# Altium PCB bmsMaster.PcbDoc (part 1 of 2)
Units mil, origin at the board's own origin, x right, y up, seen from the top; angles counter-clockwise.
Board outline 3600 x 5400 mil, 4 copper layers (Signal 1, Ground, Power, Signal 2), stack 65.512 mil thick; 132 components, 81 nets, 422 pads, 130 vias.
Unrouted connection lines stored in the file: 1.
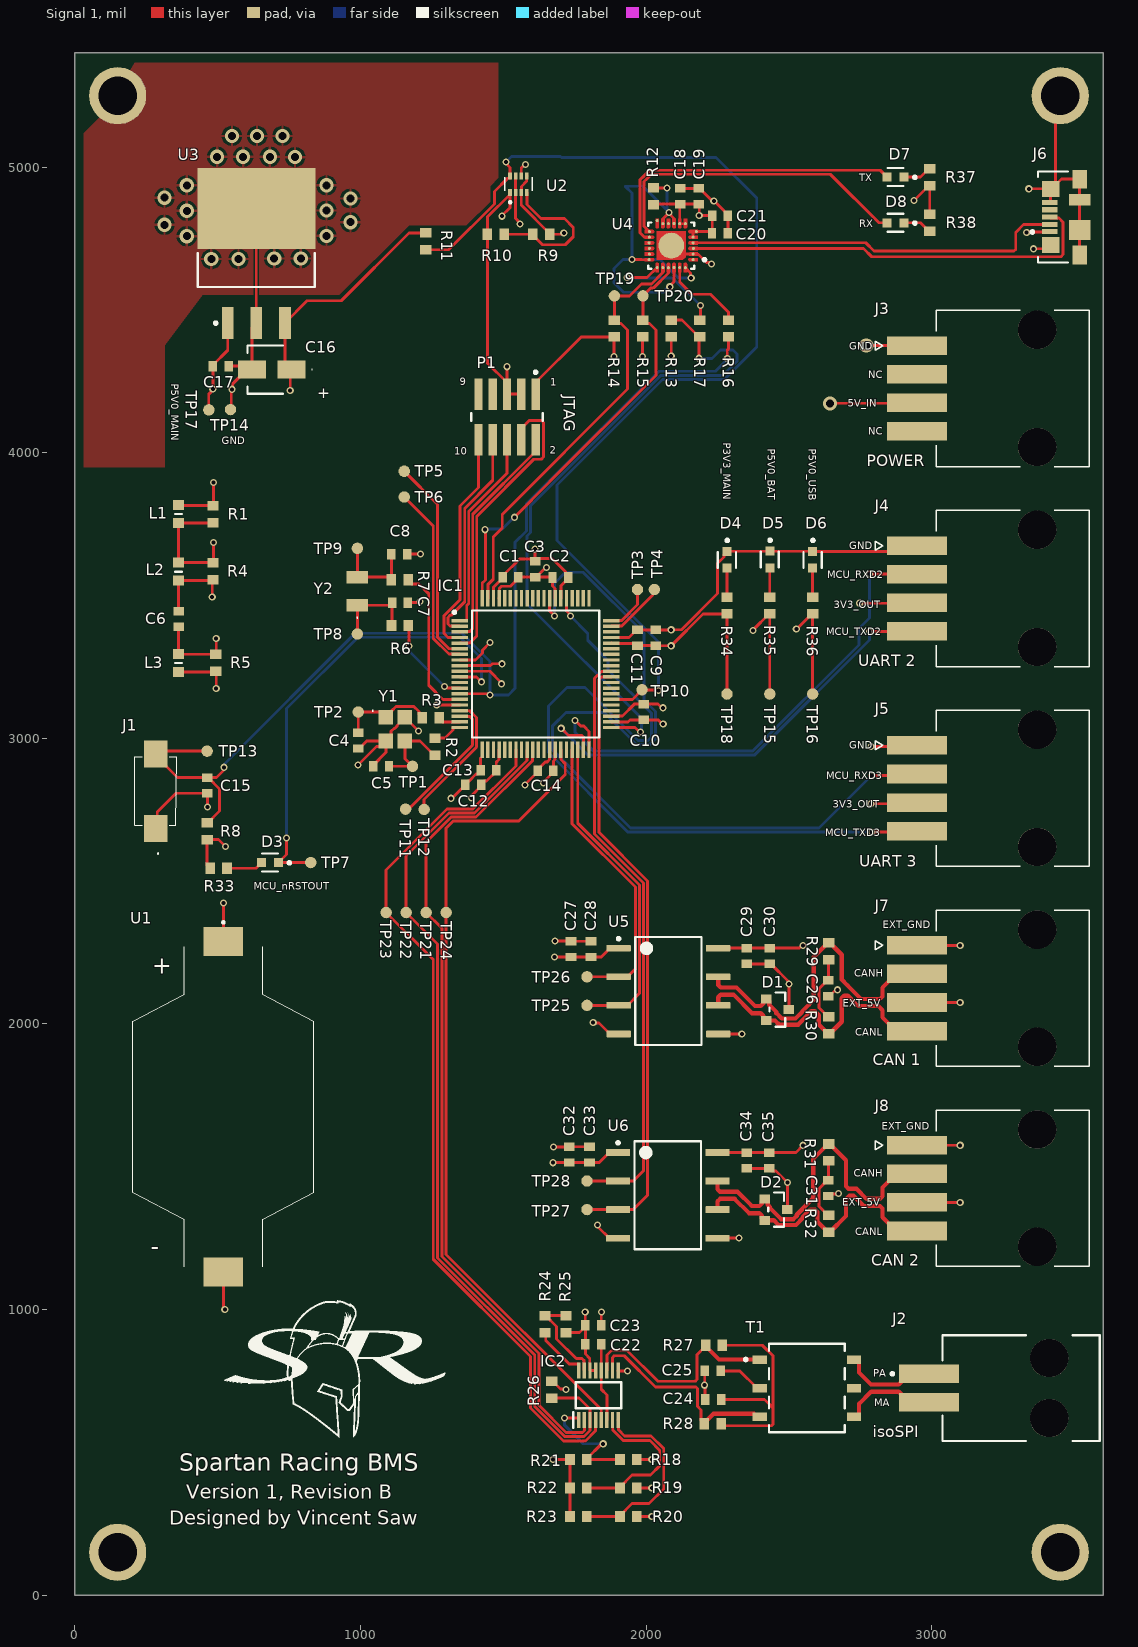
[diagram p0: Signal 1 view]
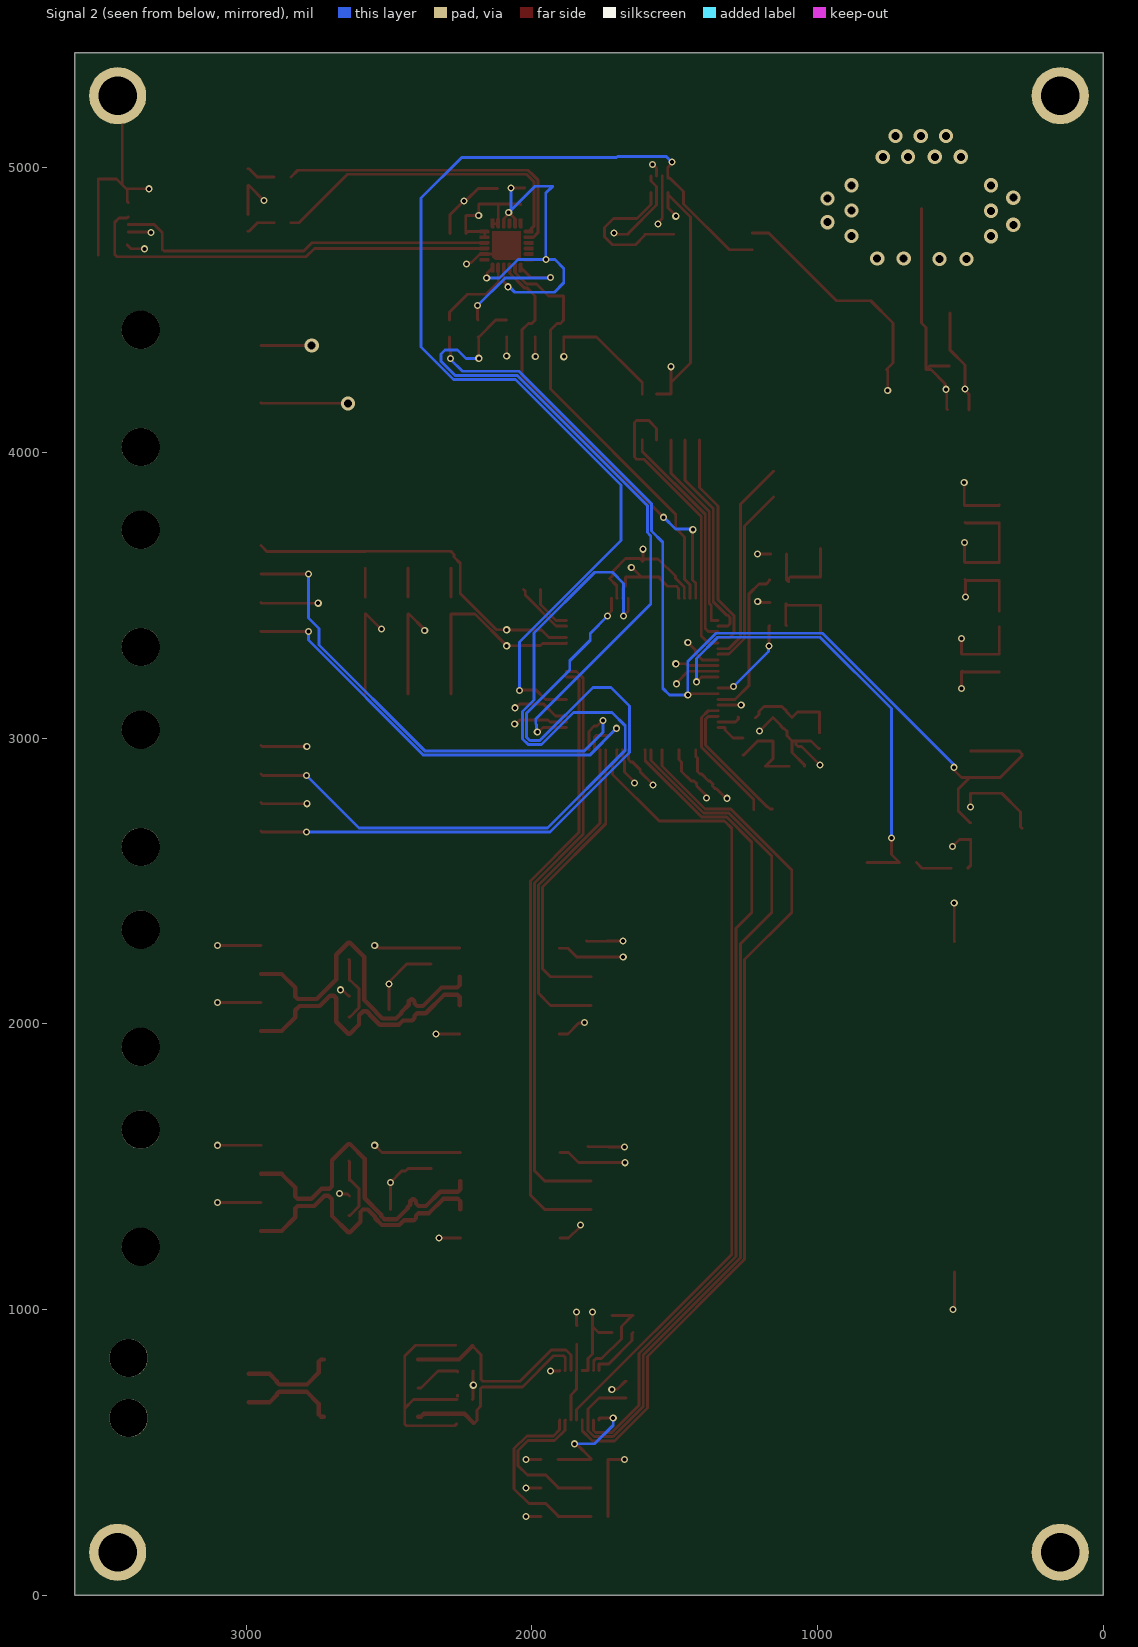
[diagram p1: Signal 2 view, seen from below]
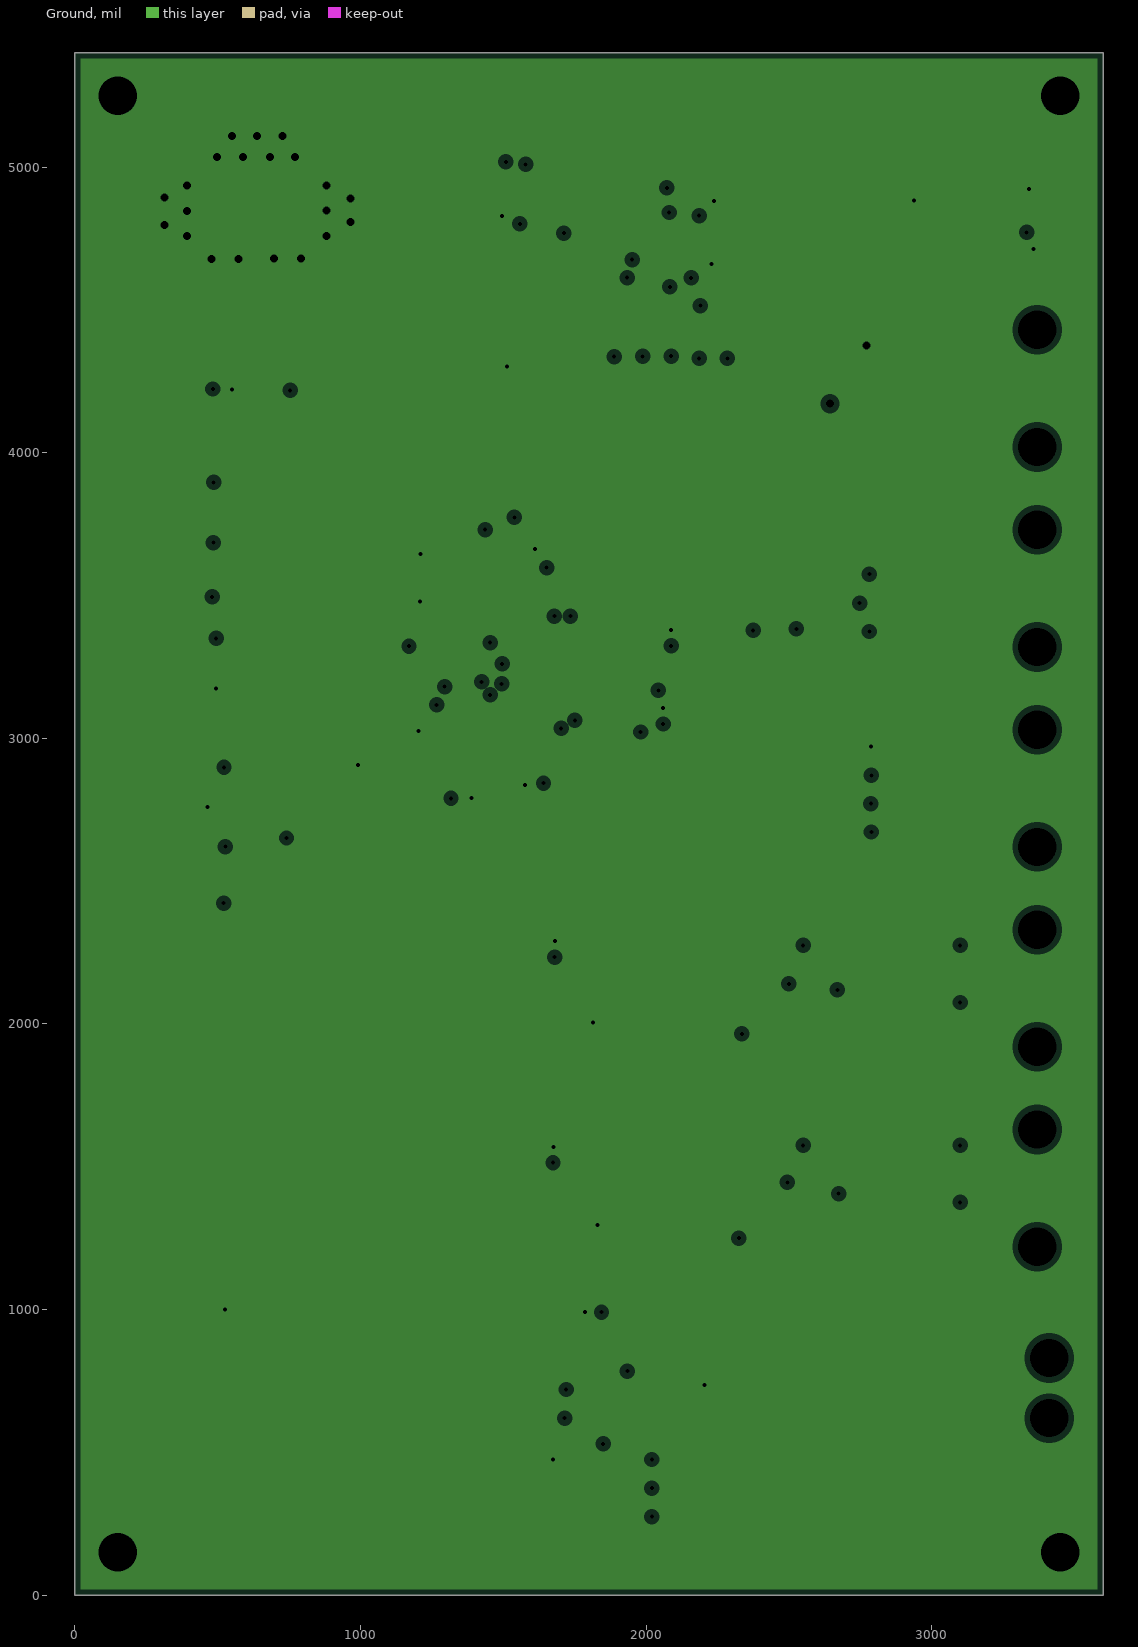
[diagram p2: Ground, clearances drawn from the general rule]
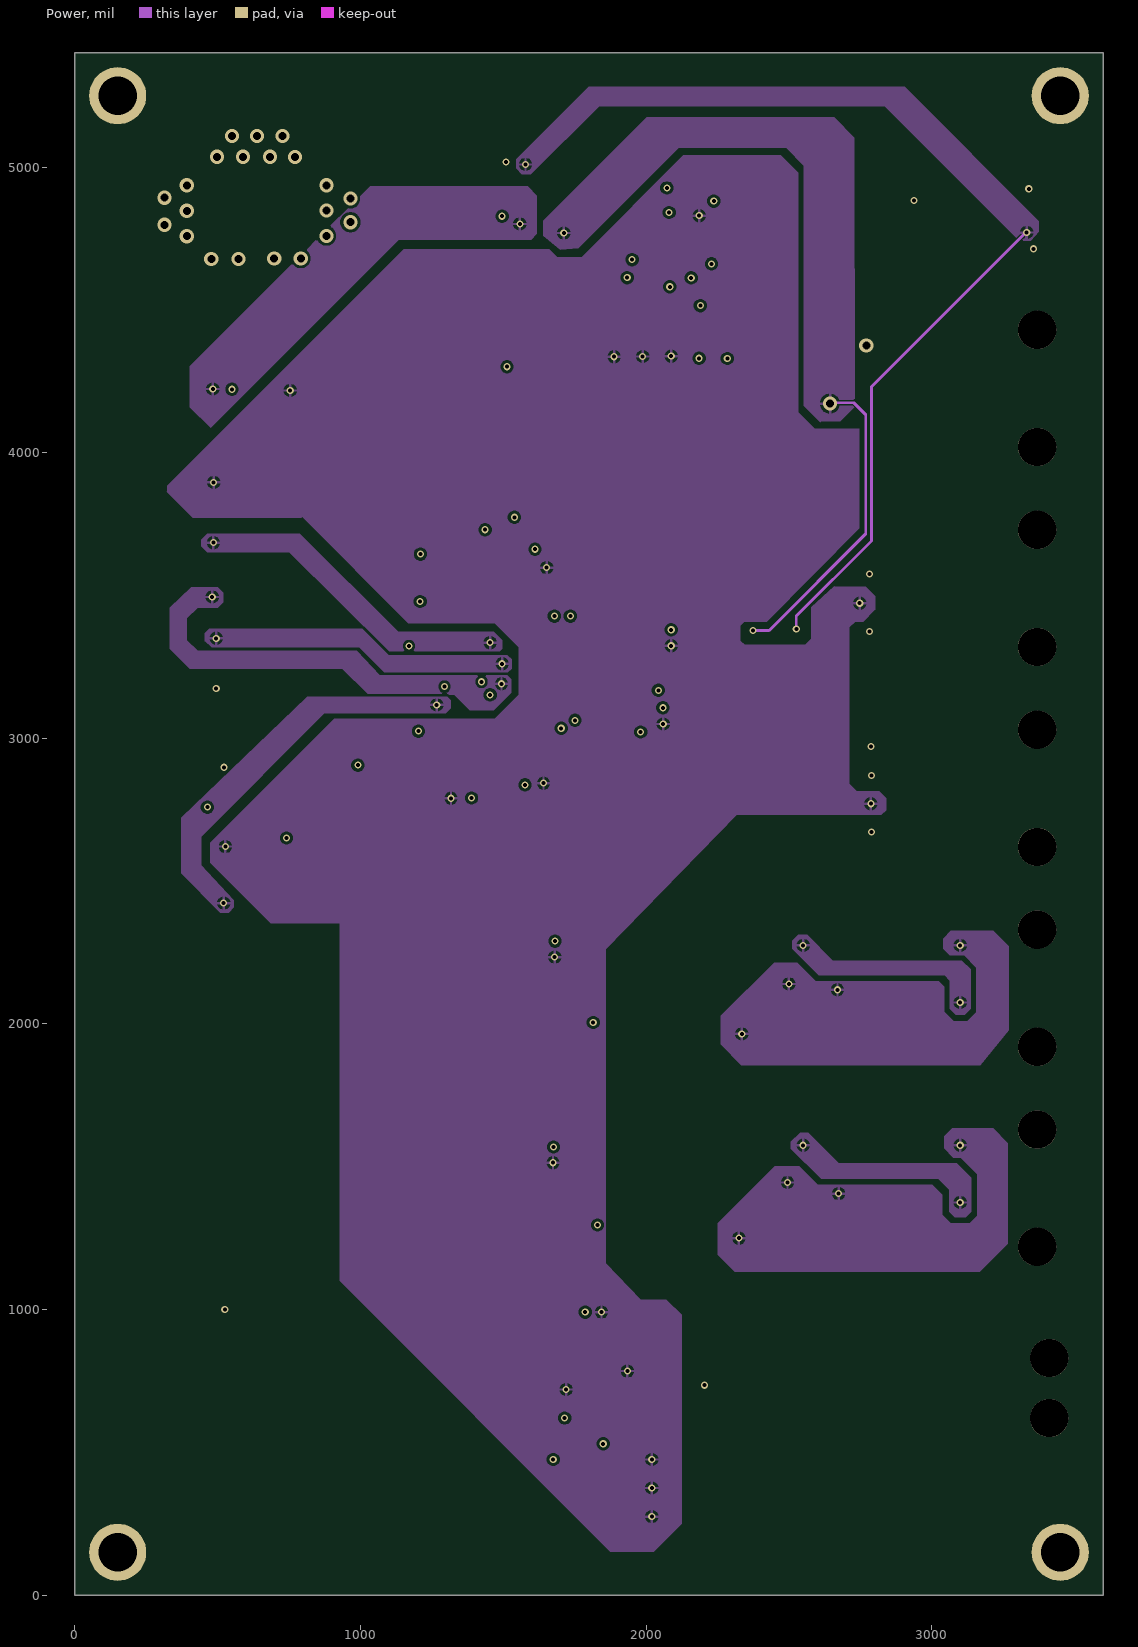
[diagram p3: Power]
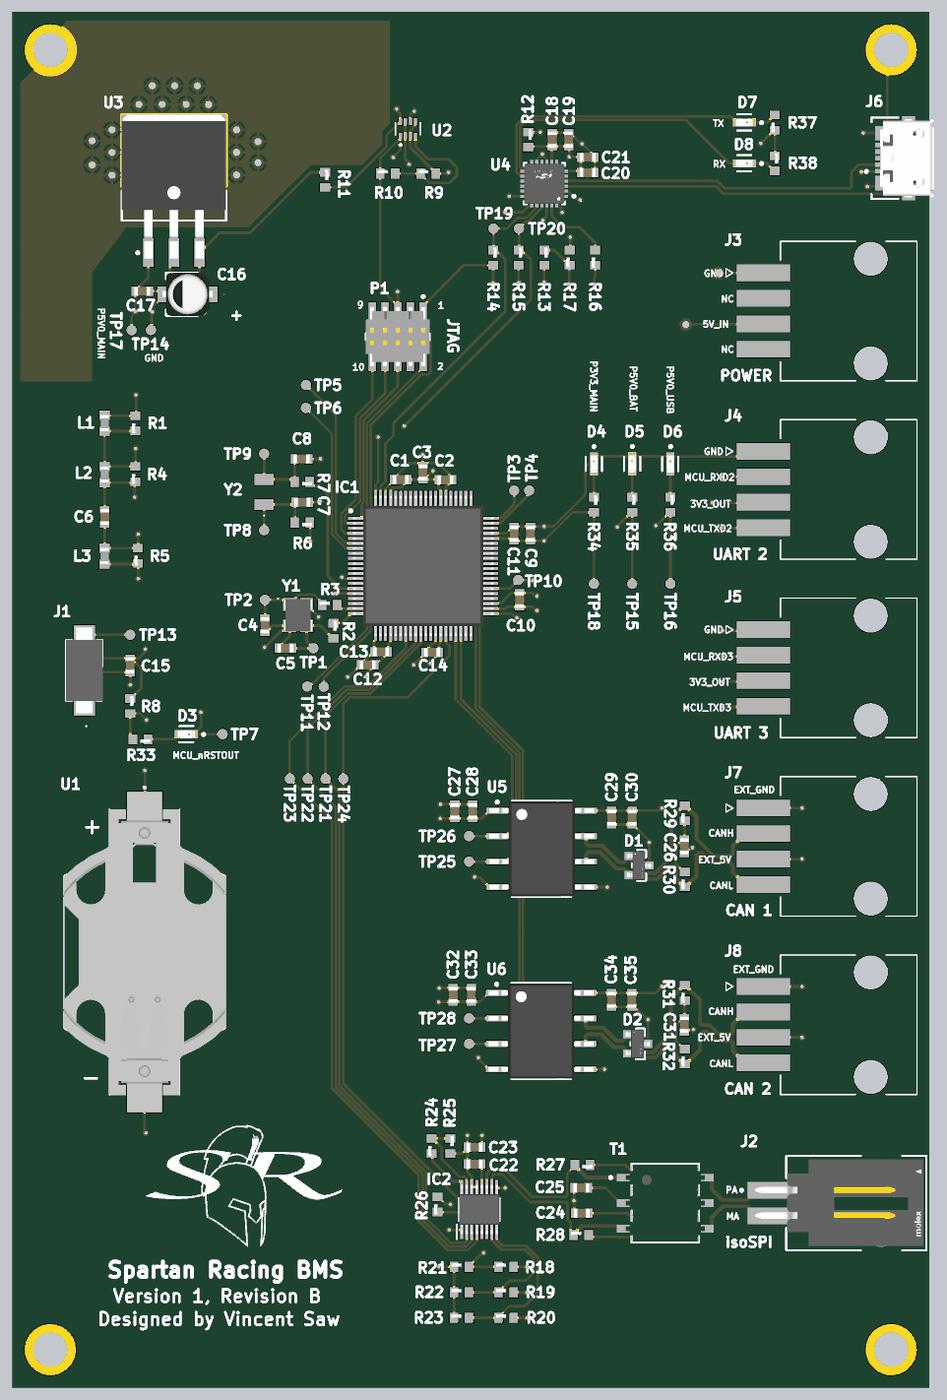
[diagram p5: 3D render of the assembled board from above, using the file's embedded part models]

## Layer stack, top to bottom
Top Solder: solder mask 0.4, Solder Resist, Dk 3.5
Signal 1: signal copper 1.378
Dielectric 2: prepreg 10, PP-006, Dk 4.1
Ground: plane copper 1.378, net GND
Dielectric 1: dielectric 40, FR-4, Dk 4.8
Power: signal copper 1.378
Dielectric 3: prepreg 10, PP-006, Dk 4.1
Signal 2: signal copper 1.378
Bottom Solder: solder mask 0.4, Solder Resist, Dk 3.5

## Board outline
3600,0 0,0 0,5400 3600,5400

## Design rules (kind name [scope] priority, off if disabled: settings)
Clearance [All] p1: gap=10 ignorepadtopadclearanceinfootprint=TRUE except(0: Arc-Hole Track-Hole THPad-Hole Via-Hole Fill-Hole Poly-Hole Region-Hole Text-Hole; 4: Track-Track; 5: Arc-Arc Arc-Track Arc-SMDPad Arc-Fill Arc-Poly Arc-Region Track-Fill Track-Poly Track-Region SMDPad-SMDPad SMDPad-Fill SMDPad-Poly SMDPad-Region SMDPad-Hole Region-Region; 8: Track-SMDPad)
DiffPairsRouting [All] p1: maxlimit=10 minlimit=4 mostfreqgap=10 toplayer_minwidth=4 toplayer_maxwidth=15 toplayer_prefwidth=10 midlayer1_minwidth=4 midlayer1_maxwidth=15 midlayer1_prefwidth=10 bottomlayer_minwidth=4 bottomlayer_maxwidth=15 bottomlayer_prefwidth=10 maxuncoupledlength=750
PlaneClearance [All] p1: clearance=20
PlaneConnect [All] p1: planeconnectstyle=Relief reliefexpansion=20 reliefentries=4 reliefconductorwidth=10 reliefairgap=10
PolygonConnect [All] p1: connectstyle=Relief reliefconductorwidth=10 reliefentries=4 polygonreliefangle="90 Angle" airgapwidth=10
RoutingVias [All] p1: holewidth=0 width=20 viastyle="Through Hole" minholewidth=0 minwidth=20 maxholewidth=28 maxwidth=50
SolderMaskExpansion SolderMaskExpansion_Via [IsVia] p1: expansion=4 istentingtop=TRUE
SolderMaskExpansion [All] p2: expansion=4 istentingtop=FALSE
Width [All] p1: maxlimit=30 minlimit=10 preferedwidth=10 midlayer1_maxwidth=10 bottomlayer_maxwidth=10 minimp=50.000000 maximp=50.000000 favimp=50.000000
27 further rules are at their usual default settings.

## Classes and differential pairs
component class bmsMaster_usb: C18 C19 C21 R12 R13 R14 R15 R16 R17 TP19 TP20 U4
component class bmsMaster_power: C16 C17 R9 R10 R11 TP14 TP15 TP16 TP18 U2 U3
component class bmsMaster_main: C1 C2 C3 C4 C5 C6 C7 C8 C10 C11 C12 C13 C14 C15 J1 L1 L2 L3 R1 R2 R3 R4 R5 R6 R7 R8 TP1 TP2 TP3 TP4 TP5 TP6 TP7 TP8 TP9 TP10 TP11 TP12 TP13 U1 Y1 Y2
component class bmsMaster_led: D3 D4 D5 D6 D7 D8 R33 R34 R35 R36 R37 R38
component class bmsMaster_isospi: C22 C23 C24 C25 IC2 R18 R19 R20 R21 R22 R23 R24 R25 R26 R27 T1 TP21 TP22 TP23 TP24
component class bmsMaster_conn: J2 J3 J4 J5 J6 J7 J8 P1
component class bmsMaster_can: C26 C27 C28 C29 C30 C31 C32 C33 C34 C35 D1 D2 R29 R30 R31 R32 TP25 TP26 TP27 TP28 U5 U6
differential pair USB_D: +USB_D_P -USB_D_N
differential pair ISO_xA: +ISO_xA_P -ISO_xA_N
differential pair ISO_Ix: +ISO_Ix_P -ISO_Ix_N
differential pair CAN_EXT_2: +CAN_EXT_2_P -CAN_EXT_2_N
differential pair CAN_EXT_1: +CAN_EXT_1_P -CAN_EXT_1_N

## Components (designator, comment, footprint, x,y, rotation, side; value= is the part's Value field where it differs from the comment)
C1 "Capacitor" CAPC1608X90N 1525,3564 r0 top value=100n
C2 "Capacitor" CAPC1608X90N 1700,3563 r180 top value=100n
C3 "Capacitor" CAPC1608X90N 1612,3592 r270 top value=10u
C4 "Capacitor" CAPC1608X90N 992.27,2992 r270 top value=20p
C5 "Capacitor" CAPC1608X90N 1072.27,2902 r0 top value=20p
C6 "Capacitor" CAPC1608X90N 363.27,3417.44 r90 top value=100n
C7 "Capacitor" CAPC1608X90N 1138.27,3475 r180 top value=21p
C8 "Capacitor" CAPC1608X90N 1135.83,3645 r180 top value=21p
C9 "Capacitor" CAPC1608X90N 2034,3352 r270 top value=10u
C10 "Capacitor" CAPC1608X90N 1992,3092 r270 top value=100n
C11 "Capacitor" CAPC1608X90N 1970,3352 r270 top value=100n
C12 "Capacitor" CAPC1608X90N 1395,2837 r180 top value=10u
C13 "Capacitor" CAPC1608X90N 1448,2888 r180 top value=100n
C14 "Capacitor" CAPC1608X90N 1648,2886 r0 top value=100n
C15 "Capacitor" CAPC1608X90N 463.27,2835 r90 top value=100n
C16 "EEE-FPJ470UAR" EEE1AA220WR 689,4290.9 r180 top
C17 "Capacitor" CAPC1608X90N 511,4303 r180 top value=0.47u
C18 "Capacitor" CAPC1608X90N 2119.73,4898 r270 top value=100n
C19 "Capacitor" CAPC1608X90N 2184,4898 r270 top value=100n
C20 "Capacitor" CAPC1608X90N 2258.44,4768 r180 top value=100n
C21 "Capacitor" CAPC1608X90N 2259.15,4829 r180 top value=10u
C22 "Capacitor" CAPC1608X90N 1815,878 r180 top value=100n
C23 "Capacitor" CAPC1608X90N 1815,944.27 r180 top value=10u
C24 "Capacitor" CAPC1608X90N 2235,685 r0 top value=10n
C25 "Capacitor" CAPC1608X90N 2233.27,785 r0 top value=10n
C26 "Capacitor" CAPC1608X90N 2638.27,2125 r90 top value=100n
C27 "Capacitor" CAPC1608X90N 1737.27,2262 r90 top value=100n
C28 "Capacitor" CAPC1608X90N 1807.27,2262 r90 top value=10u
C29 "Capacitor" CAPC1608X90N 2353,2238 r90 top value=100n
C30 "Capacitor" CAPC1608X90N 2433,2238 r90 top value=10u
C31 "Capacitor" CAPC1608X90N 2638.27,1425 r90 top value=100n
C32 "Capacitor" CAPC1608X90N 1731.27,1542.44 r90 top value=100n
C33 "Capacitor" CAPC1608X90N 1802,1542.44 r90 top value=10u
C34 "Capacitor" CAPC1608X90N 2352,1522 r90 top value=100n
C35 "Capacitor" CAPC1608X90N 2432,1522 r90 top value=10u
D1 "SZNUP2105LT1G" FP-318-08-MFG 2460,2050 r0 top value=30pF
D2 "SZNUP2105LT1G" FP-318-08-MFG 2455,1350 r0 top value=30pF
D3 "LS L29K-G1J2-1-Z" FP-LS_L29K-MFG 683.27,2565 r180 top
D4 "LS L29K-G1J2-1-Z" FP-LS_L29K-MFG 2283.27,3625 r270 top
D5 "LS L29K-G1J2-1-Z" FP-LS_L29K-MFG 2433.27,3625.47 r270 top
D6 "LS L29K-G1J2-1-Z" FP-LS_L29K-MFG 2583.27,3625 r270 top
D7 "LS L29K-G1J2-1-Z" FP-LS_L29K-MFG 2873.27,4965 r180 top
D8 "LS L29K-G1J2-1-Z" FP-LS_L29K-MFG 2873.27,4805 r180 top
IC1 "LPC4078FBD80,551" QFP50P1400X1400X160-80N 1613.27,3225 r0 top
IC2 "LTC6820HMS#PBF" SOP50P490X110-16N 1833.27,700 r90 top
J1 "PTS636_SM25F_SMTR_LFS" PTS636SM25FSMTRLFS 283.27,2815 r90 top
J2 "15-91-2025" FP-15-91-2025-MFG 3313.27,725 r90 top
J3 "1719770004" MOLEX_1719770004 3213.27,4225 r90 top
J4 "1719770004" MOLEX_1719770004 3213.27,3525 r90 top
J5 "1719770004" MOLEX_1719770004 3213.27,2825 r90 top
J6 "473460001" FP-473460001-MFG 3504.21,4825 r90 top
J7 "1719770004" MOLEX_1719770004 3213.27,2125 r90 top
J8 "1719770004" MOLEX_1719770004 3213.27,1425 r90 top
L1 "Inductor" BEADC1608X95N 363.27,3785 r90 top
L2 "Inductor" BEADC1608X95N 363.27,3583.5 r90 top
L3 "Inductor" BEADC1608X95N 363.27,3263.5 r90 top
P1 "FTSH-105-01-F-DV-K" SMTC-FTSH-105-01-L-DV-K_V 1513.27,4125 r180 top
R1 "Resistor" RESC1608X50N 483.27,3785 r90 top value=0
R2 "Resistor" RESC1608X50N 1261,2971 r270 top value=0
R3 "Resistor" RESC1608X50N 1246,3072 r0 top value=0
R4 "Resistor" RESC1608X50N 483.27,3585.47 r90 top value=0
R5 "Resistor" RESC1608X50N 493.27,3265 r90 top value=0
R6 "Resistor" RESC1608X50N 1138.27,3395 r180 top value=0
R7 "Resistor" RESC1608X50N 1137.8,3555 r180 top value=0
R8 "Resistor" RESC1608X50N 463.27,2675 r270 top value=10k
R9 "Resistor" RESC1608X50N 1632.8,4765 r0 top value=10k
R10 "Resistor" RESC1608X50N 1473.74,4765 r0 top value=35k
R11 "Resistor" RESC1608X50N 1228.27,4740 r270 top value=10k
R12 "Resistor" RESC1608X50N 2026,4898 r270 top value=10k
R13 "Resistor" RESC1608X50N 2088.27,4435 r270 top value=10k
R14 "Resistor" RESC1608X50N 1888.27,4435 r270 top value=10k
R15 "Resistor" RESC1608X50N 1988.27,4435 r270 top value=10k
R16 "Resistor" RESC1608X50N 2288.27,4435 r90 top value=100
R17 "Resistor" RESC1608X50N 2188.27,4435 r90 top value=100
R18 "Resistor" RESC1608X50N 1938.27,475 r0 top value=0
R19 "Resistor" RESC1608X50N 1938.27,375 r0 top value=0
R20 "Resistor" RESC1608X50N 1938.27,275 r0 top value=0
R21 "Resistor" RESC1608X50N 1763.27,475 r0 top value=0
R22 "Resistor" RESC1608X50N 1763.27,375 r0 top value=0
R23 "Resistor" RESC1608X50N 1763.27,275 r0 top value=0
R24 "Resistor" RESC1608X50N 1646,949 r90 top value=1.2k
R25 "Resistor" RESC1608X50N 1719.27,949 r270 top value=806
R26 "Resistor" RESC1608X50N 1670,719.53 r90 top value=2k
R27 "Resistor" RESC1608X50N 2237.8,875 r180 top value=59.4
R28 "Resistor" RESC1608X50N 2233.27,600 r0 top value=59.4
R29 "Resistor" RESC1608X50N 2640,2255 r90 top value=59.4
R30 "Resistor" RESC1608X50N 2640,1995 r90 top value=59.4
R31 "Resistor" RESC1608X50N 2640,1550 r90 top value=59.4
R32 "Resistor" RESC1608X50N 2640,1300 r90 top value=59.4
R33 "Resistor" RESC1608X50N 503.27,2545 r180 top value=470
R34 "Resistor" RESC1608X50N 2283.27,3465 r270 top value=470
R35 "Resistor" RESC1608X50N 2433.27,3465 r270 top value=1k
R36 "Resistor" RESC1608X50N 2583.27,3465 r270 top value=1k
R37 "Resistor" RESC1608X50N 2993.27,4964.53 r90 top value=470
R38 "Resistor" RESC1608X50N 2993.27,4805 r270 top value=470
T1 "SM91502ALE" FP-SM91502ALE-MFG 2563.27,725 r0 top
TP1 "TSTPT" Testpoint1 1182.27,2902 r90 top
TP2 "TSTPT" Testpoint1 992.27,3092 r90 top
TP3 "TSTPT" Testpoint1 1970,3521 r90 top
TP4 "TSTPT" Testpoint1 2029,3521 r180 top
TP5 "TSTPT" Testpoint1 1153.27,3935 r90 top
TP6 "TSTPT" Testpoint1 1153.27,3845 r90 top
TP7 "TSTPT" Testpoint1 826,2565 r90 top
TP8 "TSTPT" Testpoint1 989.13,3365.21 r90 top
TP9 "TSTPT" Testpoint1 989.13,3665.21 r90 top
TP10 "TSTPT" Testpoint1 1986,3170 r90 top
TP11 "TSTPT" Testpoint1 1158,2752 r90 top
TP12 "TSTPT" Testpoint1 1223,2751 r90 top
TP13 "TSTPT" Testpoint1 463.27,2955 r90 top
TP14 "TSTPT" Testpoint1 545,4151 r270 top
TP15 "TSTPT" Testpoint1 2433.27,3155 r90 top
TP16 "TSTPT" Testpoint1 2583.27,3155 r90 top
TP17 "TSTPT" Testpoint1 469,4150 r270 top
TP18 "TSTPT" Testpoint1 2283.27,3155 r90 top
TP19 "TSTPT" Testpoint1 1889,4549 r90 top
TP20 "TSTPT" Testpoint1 1989,4549 r90 top
TP21 "TSTPT" Testpoint1 1230,2390 r90 top
TP22 "TSTPT" Testpoint1 1160,2390 r90 top
TP23 "TSTPT" Testpoint1 1090,2390 r90 top
TP24 "TSTPT" Testpoint1 1300,2390 r90 top
TP25 "TSTPT" Testpoint1 1793.27,2065 r90 top
TP26 "TSTPT" Testpoint1 1793.27,2165 r90 top
TP27 "TSTPT" Testpoint1 1793.27,1350 r90 top
TP28 "TSTPT" Testpoint1 1793.27,1450 r90 top
U1 "SMTU2032-LF" SMTU2032LF 520,1710 r270 top
U2 "TPS2116DRLR" SOTFL50P160X60-8N 1553.27,4940 r90 top
U3 "LM3940IS-3.3" KTT0003B_N 635.27,4698 r90 top
U4 "CP2102N-A02-GQFN24" FP-CP2102N-A02-GQFN24-MFG 2088.27,4725 r180 top
U5 "ISO1050DUBR" DUB0008A_L 2078.27,2115 r0 top
U6 "ISO1050DUBR" DUB0008A_L 2076,1400 r0 top
Y1 "FC3BACAGI16.0" FC3BACAGI160 1122.27,3032 r270 top
Y2 "FX135A-327" FX135A327 989.13,3515.21 r90 top

## Footprints (in the part's own frame and the unit in brackets; to place one, negate y for a bottom-side part, rotate by r counter-clockwise, add the part's x,y. Pads: shape width x height; smd on the part's side, far side on the other; paste and mask are expansions set on the pad)
BEADC1608X95N [mm]
  rect 0.9x1 smd: 1(-0.8,0) 2(0.8,0)
  silkscreen extent 0,-0.3 0,0.3, body extent -0.8,-0.4 0.8,0.4, height 0.95
CAPC1608X90N [mm]
  rect 0.75x0.94 smd: 1(-0.7,0) 2(0.7,0)
  body extent -0.8,-0.45 0.8,0.45, height 0.8
DUB0008A_L [mm] "SOP, 8-Leads, Body 6.7x9.6mm, Pitch 2.54mm, IPC High Density"
  rrect17% 2.15x0.6 smd: 1(-4.425,3.81) 2(-4.425,1.27) 3(-4.425,-1.27) 4(-4.425,-3.81) 5(4.425,-3.81) 6(4.425,-1.27) 7(4.425,1.27) 8(4.425,3.81)
  silkscreen extent -4.55,-4.8 2.95,4.8, body extent -5.24,-4.75 5.24,4.75, height 4.85
EEE1AA220WR [mm]
  rect 2.5x1.6 smd: 1(-1.75,0) 2(1.75,0)
  silkscreen extent -3.63,-2.15 2.15,2.15, body extent -2.5,-2.15 2.5,2.15, height 5.78
FC3BACAGI160 [mm]
  rect 1.3x1.3 smd: 1(-1.05,-0.85) 2(1.05,-0.85) 3(1.05,0.85) 4(-1.05,0.85)
  silkscreen extent -1.7,-2.05 -1.6,-1.95, body extent -1.6,-1.37 1.6,1.37, height 0.9
FP-15-91-2025-MFG [mm]
  rect 1.65x5.33 smd paste+0 mask+0: 1(1.27,8.19) 2(-1.27,8.19)
  round 3.4 hole 3.4 unplated paste-1000 mask+0: ""(-2.67,-2.5) ""(2.67,-2.5)
  silkscreen extent -4.7,-6.99 4.7,11.57, body extent -4.8,-7.09 4.8,10.95, height 0.25
FP-318-08-MFG [mm]
  rect 0.9x0.8 smd paste+0 mask+0: 1(-1,0.95) 2(-1,-0.95) 3(1,0)
  silkscreen extent -0.7,-1.52 0.7,1.52, body extent -1.55,-1.62 1.55,1.62, height 0.25
FP-473460001-MFG [mm]
  rect 0.45x1.38 smd paste+0 mask+0: 1(-1.3,2.31) 2(-0.65,2.31) 3(0,2.31) 4(0.65,2.31) 5(1.3,2.31)
  rect 1.425x1.55 smd paste+0 mask+0: 6(-2.488,2.225) 7(2.488,2.225)
  rect 1.65x1.3 smd paste+0 mask+0: 8(-3.375,-0.35) 11(3.375,-0.35)
  rect 1.8x1.9 smd paste+0 mask+0: 9(-1.15,-0.35)
  rect 1x1.9 smd paste+0 mask+0: 10(1.55,-0.35)
  silkscreen extent -4.05,0.67 4.05,3.97, body extent -4.3,-2.48 4.3,3.45, height 0.25
FP-CP2102N-A02-GQFN24-MFG [mm]
  round 0.27 smd paste+0 mask+0: 1(-1.95,1.25) 2(-1.95,0.75) 3(-1.965,0.25) 4(-1.95,-0.25) 5(-1.95,-0.75) 6(-2.225,-1.25) 7(-1.25,-1.95) 8(-0.75,-1.95) 9(-0.25,-1.965) 10(0.25,-1.95) 11(0.75,-1.95) 12(1.25,-2.225) 13(1.95,-1.25) 14(1.95,-0.75) 15(1.965,-0.25) 16(1.95,0.25) 17(1.95,0.75) 18(1.965,1.25) 19(1.25,1.95) 20(0.75,1.95) 21(0.25,1.965) 22(-0.25,1.95) 23(-0.75,1.95) 24(-1.25,1.965)
  round 2.295 smd paste+0 mask+0: 25(0,0)
  Signal 1 region: -2.375,1.4 -1.675,1.4 -1.618,1.389 -1.569,1.356 -1.536,1.307 -1.525,1.25 -1.525,1.25 -1.536,1.193 -1.569,1.144 -1.618,1.111 -1.675,1.1 -1.675,1.1 -2.375,1.1
  Signal 1 region: -2.375,0.9 -1.675,0.9 -1.618,0.889 -1.569,0.856 -1.536,0.807 -1.525,0.75 -1.525,0.75 -1.536,0.693 -1.569,0.644 -1.618,0.611 -1.675,0.6 -1.675,0.6 -2.375,0.6
  Signal 1 region: -2.375,0.4 -1.675,0.4 -1.618,0.389 -1.569,0.356 -1.536,0.307 -1.525,0.25 -1.525,0.25 -1.536,0.193 -1.569,0.144 -1.618,0.111 -1.675,0.1 -1.675,0.1 -2.375,0.1
  Signal 1 region: -2.375,-0.1 -1.675,-0.1 -1.618,-0.111 -1.569,-0.144 -1.536,-0.193 -1.525,-0.25 -1.525,-0.25 -1.536,-0.307 -1.569,-0.356 -1.618,-0.389 -1.675,-0.4 -1.675,-0.4 -2.375,-0.4
  Signal 1 region: -2.375,-0.6 -1.675,-0.6 -1.618,-0.611 -1.569,-0.644 -1.536,-0.693 -1.525,-0.75 -1.525,-0.75 -1.536,-0.807 -1.569,-0.856 -1.618,-0.889 -1.675,-0.9 -1.675,-0.9 -2.375,-0.9
  Signal 1 region: -2.375,-1.1 -1.675,-1.1 -1.618,-1.111 -1.569,-1.144 -1.536,-1.193 -1.525,-1.25 -1.525,-1.25 -1.536,-1.307 -1.569,-1.356 -1.618,-1.389 -1.675,-1.4 -1.675,-1.4 -2.375,-1.4
  Signal 1 region: -1.4,-2.375 -1.4,-1.675 -1.389,-1.618 -1.356,-1.569 -1.307,-1.536 -1.25,-1.525 -1.25,-1.525 -1.193,-1.536 -1.144,-1.569 -1.111,-1.618 -1.1,-1.675 -1.1,-1.675 -1.1,-2.375
  Signal 1 region: -0.9,-2.375 -0.9,-1.675 -0.889,-1.618 -0.856,-1.569 -0.807,-1.536 -0.75,-1.525 -0.75,-1.525 -0.693,-1.536 -0.644,-1.569 -0.611,-1.618 -0.6,-1.675 -0.6,-1.675 -0.6,-2.375
  Signal 1 region: -0.4,-2.375 -0.4,-1.675 -0.389,-1.618 -0.356,-1.569 -0.307,-1.536 -0.25,-1.525 -0.25,-1.525 -0.193,-1.536 -0.144,-1.569 -0.111,-1.618 -0.1,-1.675 -0.1,-1.675 -0.1,-2.375
  Signal 1 region: 0.1,-2.375 0.1,-1.675 0.111,-1.618 0.144,-1.569 0.193,-1.536 0.25,-1.525 0.25,-1.525 0.307,-1.536 0.356,-1.569 0.389,-1.618 0.4,-1.675 0.4,-1.675 0.4,-2.375
  Signal 1 region: 0.6,-2.375 0.6,-1.675 0.611,-1.618 0.644,-1.569 0.693,-1.536 0.75,-1.525 0.75,-1.525 0.807,-1.536 0.856,-1.569 0.889,-1.618 0.9,-1.675 0.9,-1.675 0.9,-2.375
  Signal 1 region: 1.1,-2.375 1.1,-1.675 1.111,-1.618 1.144,-1.569 1.193,-1.536 1.25,-1.525 1.25,-1.525 1.307,-1.536 1.356,-1.569 1.389,-1.618 1.4,-1.675 1.4,-1.675 1.4,-2.375
  Signal 1 region: 2.375,-1.4 1.675,-1.4 1.618,-1.389 1.569,-1.356 1.536,-1.307 1.525,-1.25 1.525,-1.25 1.536,-1.193 1.569,-1.144 1.618,-1.111 1.675,-1.1 1.675,-1.1 2.375,-1.1
  Signal 1 region: 2.375,-0.9 1.675,-0.9 1.618,-0.889 1.569,-0.856 1.536,-0.807 1.525,-0.75 1.525,-0.75 1.536,-0.693 1.569,-0.644 1.618,-0.611 1.675,-0.6 1.675,-0.6 2.375,-0.6
  Signal 1 region: 2.375,-0.4 1.675,-0.4 1.618,-0.389 1.569,-0.356 1.536,-0.307 1.525,-0.25 1.525,-0.25 1.536,-0.193 1.569,-0.144 1.618,-0.111 1.675,-0.1 1.675,-0.1 2.375,-0.1
  Signal 1 region: 2.375,0.1 1.675,0.1 1.618,0.111 1.569,0.144 1.536,0.193 1.525,0.25 1.525,0.25 1.536,0.307 1.569,0.356 1.618,0.389 1.675,0.4 1.675,0.4 2.375,0.4
  Signal 1 region: 2.375,0.6 1.675,0.6 1.618,0.611 1.569,0.644 1.536,0.693 1.525,0.75 1.525,0.75 1.536,0.807 1.569,0.856 1.618,0.889 1.675,0.9 1.675,0.9 2.375,0.9
  Signal 1 region: 2.375,1.1 1.675,1.1 1.618,1.111 1.569,1.144 1.536,1.193 1.525,1.25 1.525,1.25 1.536,1.307 1.569,1.356 1.618,1.389 1.675,1.4 1.675,1.4 2.375,1.4
  Signal 1 region: 1.4,2.375 1.4,1.675 1.389,1.618 1.356,1.569 1.307,1.536 1.25,1.525 1.25,1.525 1.193,1.536 1.144,1.569 1.111,1.618 1.1,1.675 1.1,1.675 1.1,2.375
  Signal 1 region: 0.9,2.375 0.9,1.675 0.889,1.618 0.856,1.569 0.807,1.536 0.75,1.525 0.75,1.525 0.693,1.536 0.644,1.569 0.611,1.618 0.6,1.675 0.6,1.675 0.6,2.375
  Signal 1 region: 0.4,2.375 0.4,1.675 0.389,1.618 0.356,1.569 0.307,1.536 0.25,1.525 0.25,1.525 0.193,1.536 0.144,1.569 0.111,1.618 0.1,1.675 0.1,1.675 0.1,2.375
  Signal 1 region: -0.1,2.375 -0.1,1.675 -0.111,1.618 -0.144,1.569 -0.193,1.536 -0.25,1.525 -0.25,1.525 -0.307,1.536 -0.356,1.569 -0.389,1.618 -0.4,1.675 -0.4,1.675 -0.4,2.375
  Signal 1 region: -0.6,2.375 -0.6,1.675 -0.611,1.618 -0.644,1.569 -0.693,1.536 -0.75,1.525 -0.75,1.525 -0.807,1.536 -0.856,1.569 -0.889,1.618 -0.9,1.675 -0.9,1.675 -0.9,2.375
  Signal 1 region: -1.1,2.375 -1.1,1.675 -1.111,1.618 -1.144,1.569 -1.193,1.536 -1.25,1.525 -1.25,1.525 -1.307,1.536 -1.356,1.569 -1.389,1.618 -1.4,1.675 -1.4,1.675 -1.4,2.375
  Signal 1 region: -1.275,-1.275 -1.275,1.025 -1.025,1.275 1.275,1.275 1.275,-1.275 -1.275,-1.275
  silkscreen extent -3.08,-2.05 2.05,2.05, body extent -2.48,-2.48 2.48,2.48, height 0.25
FP-LS_L29K-MFG [mm]
  rect 0.8x0.8 smd paste-1000 mask+0: 1(-0.75,0) 2(0.75,0)
  silkscreen extent -1.85,-0.81 0.7,0.8, body extent -1.25,-0.55 1.25,0.55, height 0.25
FP-SM91502ALE-MFG [mm]
  rect 1.27x0.76 smd paste+0 mask+0: 1(-4.19,2.54) 2(-4.19,0) 3(-4.19,-2.54) 4(4.19,-2.54) 5(4.19,0) 6(4.19,2.54)
  silkscreen extent -5.56,-3.94 3.36,3.94, body extent -4.92,-4.04 4.92,4.04, height 0.25
FX135A327 [mm]
  rect 1.1x1.9 smd: 1(-1.25,0) 2(1.25,0)
  silkscreen extent -2.4,-0.05 -2.3,0.05
KTT0003B_N [mm] "D2-PAK, 3-Leads, Body 10.41x8.89mm, Pitch 2.54mm, IPC Medium Density"
  rect 2.85x1.05 smd: 1(-6.2,2.54) 2(-6.2,0) 3(-6.2,-2.54)
  rect 7.2x10.5 smd: 4(4,0)
  silkscreen extent -6.32,-5.2 0,5.2, body extent -6.78,-5.2 7.57,5.2, height 4.64
MOLEX_1719770004 [mm]
  rect 1.65x5.33 smd mask+0.076: 1(3.81,6.725) 2(1.27,6.725) 3(-1.27,6.725) 4(-3.81,6.725)
  round 3.4 hole 3.4 unplated mask+0.076: ""(-5.21,-3.965) ""(5.21,-3.965)
  silkscreen extent -6.95,-8.57 6.95,10.46
PTS636SM25FSMTRLFS [mm]
  rect 2.4x2.1 smd: 1(-3.3,0) 2(3.3,0)
  silkscreen extent -5.6,-1.85 3.05,1.85, body extent -4.29,-1.85 4.29,1.85, height 2.8
QFP50P1400X1400X160-80N [mm]
  rect 1.475x0.3 smd: 1(-6.738,4.75) 2(-6.738,4.25) 3(-6.738,3.75) 4(-6.738,3.25) 5(-6.738,2.75) 6(-6.738,2.25) 7(-6.738,1.75) 8(-6.738,1.25) 9(-6.738,0.75) 10(-6.738,0.25) 11(-6.738,-0.25) 12(-6.738,-0.75) 13(-6.738,-1.25) 14(-6.738,-1.75) 15(-6.738,-2.25) 16(-6.738,-2.75) 17(-6.738,-3.25) 18(-6.738,-3.75) 19(-6.738,-4.25) 20(-6.738,-4.75) 41(6.738,-4.75) 42(6.738,-4.25) 43(6.738,-3.75) 44(6.738,-3.25) 45(6.738,-2.75) 46(6.738,-2.25) 47(6.738,-1.75) 48(6.738,-1.25) 49(6.738,-0.75) 50(6.738,-0.25) 51(6.738,0.25) 52(6.738,0.75) 53(6.738,1.25) 54(6.738,1.75) 55(6.738,2.25) 56(6.738,2.75) 57(6.738,3.25) 58(6.738,3.75) 59(6.738,4.25) 60(6.738,4.75)
  rect 0.3x1.475 smd: 21(-4.75,-6.738) 22(-4.25,-6.738) 23(-3.75,-6.738) 24(-3.25,-6.738) 25(-2.75,-6.738) 26(-2.25,-6.738) 27(-1.75,-6.738) 28(-1.25,-6.738) 29(-0.75,-6.738) 30(-0.25,-6.738) 31(0.25,-6.738) 32(0.75,-6.738) 33(1.25,-6.738) 34(1.75,-6.738) 35(2.25,-6.738) 36(2.75,-6.738) 37(3.25,-6.738) 38(3.75,-6.738) 39(4.25,-6.738) 40(4.75,-6.738) 61(4.75,6.738) 62(4.25,6.738) 63(3.75,6.738) 64(3.25,6.738) 65(2.75,6.738) 66(2.25,6.738) 67(1.75,6.738) 68(1.25,6.738) 69(0.75,6.738) 70(0.25,6.738) 71(-0.25,6.738) 72(-0.75,6.738) 73(-1.25,6.738) 74(-1.75,6.738) 75(-2.25,6.738) 76(-2.75,6.738) 77(-3.25,6.738) 78(-3.75,6.738) 79(-4.25,6.738) 80(-4.75,6.738)
  silkscreen extent -7.35,-5.65 5.65,5.65, body extent -7,-7 7,7, height 1.6
RESC1608X50N [mm]
  rect 0.85x1 smd: 1(-0.75,0) 2(0.75,0)
  body extent -1,0 0,0.35, height 0.5
SMTC-FTSH-105-01-L-DV-K_V [mm] "CONN, 10-Leads, Body 6.35x3.43mm, Pitch 1.27mm"
  rect 0.74x2.79 smd: 1(-2.54,-2.035) 2(-2.54,2.035) 3(-1.27,-2.035) 4(-1.27,2.035) 5(0,-2.035) 6(0,2.035) 7(1.27,-2.035) 8(1.27,2.035) 9(2.54,-2.035) 10(2.54,2.035)
  silkscreen extent -3.17,-4.1 3.17,0.34, body extent -3.17,-2.92 3.18,2.92, height 6.12
SMTU2032LF [mm]
  rect 2.6x3.5 smd: 1(-14.7,0) 2(14.7,0)
  silkscreen extent -16.5,-8.05 14.25,8.05, body extent -15.9,-8.05 15.9,8.05, height 5.4
SOP50P490X110-16N [mm]
  rect 1.425x0.3 smd: 1(-2.212,1.75) 2(-2.212,1.25) 3(-2.212,0.75) 4(-2.212,0.25) 5(-2.212,-0.25) 6(-2.212,-0.75) 7(-2.212,-1.25) 8(-2.212,-1.75) 9(2.212,-1.75) 10(2.212,-1.25) 11(2.212,-0.75) 12(2.212,-0.25) 13(2.212,0.25) 14(2.212,0.75) 15(2.212,1.25) 16(2.212,1.75)
  silkscreen extent -2.93,-2.02 1.15,2.25, body extent -2.45,-2.02 2.45,2.02, height 1.1
SOTFL50P160X60-8N [mm]
  rrect25% 0.66x0.32 smd: 1(-0.735,0.75) 2(-0.735,0.25) 3(-0.735,-0.25) 4(-0.735,-0.75) 5(0.735,-0.75) 6(0.735,-0.25) 7(0.735,0.25) 8(0.735,0.75)
  silkscreen extent -1.7,-1.23 0.6,1.23
Testpoint1 [mil]
  round 40 smd: 1(0,0)

## Part data
C16: "Capacitor Polarised", Manufacturer_Name=Panasonic, Mouser Part Number=667-EEE-FPJ470UAR, Datasheet Link=http://industrial.panasonic.com/cdbs/www-data/pdf/RDE0000/ABA0000C1184.pdf, Height=5.5mm, Manufacturer_Part_Number=EEE-FPJ470UAR, Mouser Price/Stock=https://www.mouser.com/Search/Refine.aspx?Keyword=667-EEE-FPJ470UAR
D1 D2: library part CMP-1063-00167-2, "TVS DIODE 24V 44V SOT23-3", Breakdown Voltage=26.2V, Capacitance=30pF, Clamping Voltage=44V, Manufacturer="ON Semiconductor", Max Junction Temp=+150°C, Package=318-08, Peak Pulse Current=8A, Peak Pulse Power=350W, Reverse Standoff Voltage=24V, Temperature="-55°C to +150°C", Temperature Range Low=-55°C, Automotive=Yes, Automotive Grade="Grade 0", Category=Diode, ComponentLink2Description=Datasheet, ComponentLink2URL=https://www.onsemi.com/pub/Collateral/NUP2105L-D.PDF, Device Class L1="Circuit Protection", Device Class L2="TVS Diodes", Device Class L3=unset, Digikey Description="TVS DIODE 24V 44V SOT23-3", Direction=Bidirectional, Footprint Url=https://www.onsemi.com/pub/Collateral/318-08.PDF, Height=1.11mm, Lead Free=Yes, Manufacturer Part Number=SZNUP2105LT1G, Number Of Channels=2, Octopart=https://octopart.com/sznup2105lt1g-on+semiconductor-22134626, RoHS=TRUE, Standoff Height=0.01mm, Temperature Range High=+150°C
D3 D4 D5 D6 D7 D8: library part CMP-62016-000014-1, "LED RED DIFFUSED 0603 SMD", Colour=Red, Forward Current=2mA, Forward Voltage=1.8V, Manufacturer="Osram Opto", Max Junction Temp=+110°C, Package=LS_L29K, Reverse Voltage=12V, Temperature="-40°C to +100°C", Temperature Range High=+100°C, Temperature Range Low=-40°C, Automotive=No, Category=Diode, ComponentLink2Description=Datasheet, ComponentLink2URL=https://dammedia.osram.info/media/resource/hires/osram-dam-5662679/LS%20L29K_EN.pdf, Device Class L1=Optoelectronics, Device Class L2=LEDs, Device Class L3=unset, Digikey Description="LED RED DIFFUSED 0603 SMD", Height=0.67mm, Lead Free=Yes, Led Orientation="Top View", Luminous Flux=0.0081/0.0254lm, Luminous Intensity=1.8-2.24/5.6-7.1mcd, Manufacturer Part Number="LS L29K-G1J2-1-Z", Mouser Description="LED Uni-Color Red 643nm Automotive 2-Pin SMD T/R", Octopart=https://octopart.com/ls+l29k-g1j2-1-z-osram+opto-31093939, Peak Emmision Wavelength=643nm, RoHS=TRUE, Viewing Angle=160°, Wavelength=630nm
IC1: "Integrated Circuit", Manufacturer_Name=NXP, Mouser Part Number=771-LPC4078FBD80551, Arrow Part Number=LPC4078FBD80,551, Arrow Price/Stock=https://www.arrow.com/en/products/lpc4078fbd80551/nxp-semiconductors, Datasheet Link=http://www.nxp.com/docs/en/data-sheet/LPC408X_7X.pdf, Height=1.6mm, Manufacturer_Part_Number=LPC4078FBD80,551, Mouser Price/Stock=https://www.mouser.co.uk/ProductDetail/NXP-Semiconductors/LPC4078FBD80551?qs=vnbNJPHmPnPMtBCcoSguaA%3D%3D
IC2: "Integrated Circuit", Manufacturer_Name="Analog Devices", Mouser Part Number=584-LTC6820HMS#PBF, Arrow Part Number=LTC6820HMS#PBF, Arrow Price/Stock=https://www.arrow.com/en/products/ltc6820hmspbf/analog-devices?region=europe, Datasheet Link=https://www.analog.com/media/en/technical-documentation/data-sheets/LTC6820.pdf, Height=1.1mm, Manufacturer_Part_Number=LTC6820HMS#PBF, Mouser Price/Stock=https://www.mouser.co.uk/ProductDetail/Analog-Devices/LTC6820HMSPBF?qs=hVkxg5c3xu%252BAhS55eUb%252BEQ%3D%3D
J1: "Connector", Arrow Part Number="PTS636 SM25F SMTR LFS", Manufacturer_Name="C & K COMPONENTS", Mouser Part Number=611-PTS636SM25FSMTRL, Arrow Price/Stock=https://www.arrow.com/en/products/pts636-sm25f-smtr-lfs/ck, Datasheet Link="https://ms.componentsearchengine.com/Datasheets/1/PTS636 SM25F SMTR LFS.pdf", Height=2.7mm, Manufacturer_Part_Number="PTS636 SM25F SMTR LFS", Mouser Price/Stock=https://www.mouser.co.uk/ProductDetail/CK/PTS636-SM25F-SMTR-LFS?qs=vLWxofP3U2wcBTQSwfMFOw%3D%3D
J2: library part CMP-04776-000618-1, "CONN HEADER SMD R/A 2POS 2.54MM", Color=Black, Contact Resistance=30mR, Current Rating=3A, Flammability Rating="UL94 V-0", Insulation Resistance=1GR, Max Current Rating=1.75A, Max Operating Temperature=105°C, Min Operating Temperature=-40°C, Package Quantity=1830, Voltage Rating=250V, Contact Gender=Male, Contact Material=Bronze, Contact Mating Length=0.24inch, Contact Plating=Gold, Contact Type="Male Pin", Depth=13.59mm, ELV=Compliant, Gender=Male, Glow Wire Compliant=Non-compliant, Height=5.56mm, Housing Color=Black, Housing Material=Polyester, Lead Free="Contains Lead", Length=8.64mm, Material=Brass, Mount="Surface Mount", Number of Circuits=2, Number of Contacts=2, Number of Positions=2, Number of Rows=1, Orientation="Right Angle", Packaging=Rail/Tube, Pitch=2.54mm, Radiation Hardening=No, REACH SVHC="No SVHC", RoHS Compliant=Yes, Series="C-Grid® SL™ 70634", Termination=Solder, Voltage Rating (DC)=250V
J3 J4 J5 J7 J8: "2.54mm Pitch SL Header, Single Row, Right-Angle, LCP, Shrouded, Surface Mount, with Pegs, Matte Tin (Sn) Plating, 4 Circuits, Tube", Package=None, Availability=Unavailable, MF="{'manufacturer': u'Molex'}", MP=1719770004, Price=None
J6: library part CMP-2000-05246-2, "CONN RCPT USB2.0 MICRO B SMD R/A", Current Rating=1.8A, Manufacturer=Molex, Package=0, Temperature="-30°C to +85°C", Temperature Range High=+85°C, Temperature Range Low=-30°C, Voltage Rating=30V, Automotive=No, Category=Conn, ComponentLink2Description=Datasheet, ComponentLink2URL=https://www.molex.com/webdocs/datasheets/pdf/en-us/0473460001_IO_CONNECTORS.pdf, Conn Orientation="Right Angle", Contact Material=Gold,Nickel, Device Class L1=Connectors, Device Class L2="USB Connectors", Device Class L3=unset, Digikey Description="CONN RCPT USB2.0 MICRO B SMD R/A", Footprint Url=https://www.molex.com/pdm_docs/sd/473460001_sd.pdf, Height=2.945mm, Is Female=yes, Lead Free=Yes, Manufacturer Part Number=473460001, Number of Contacts=5, Octopart=https://octopart.com/47346-0001-molex-7164928, Pitch=0.65mm, RoHS=TRUE, Shielding=true, Usb Standard="USB 2.0"
P1: library part CMP-2000-05352-1, "Male Header, Pitch 1.27 mm, 2 x 5 Position, Height 6.12 mm, RoHS, Tube", Color=Black, Manufacturer=Samtec, Package Description="Male Header, Pitch 1.27 mm, 2 x 5 Position, Height 5.97 mm, Tail Length 4.32 mm", Package Reference=FTSH-105-01-L-DV-K, Category=Connectors,Interconnects, Connector Type=Header,Shrouded, Contact Finish=Gold, Contact Finish Thickness=3µin(0.08µm), Contact Mating Length="0.120\"(3.05mm)", Contact Type=MalePin, Datasheet URL=http://suddendocs.samtec.com/prints/ftsh-1xx-xx-xxx-dv-xxx-mkt.pdf, Datasheet Version="Rev. ET, 10/1995", Family=RectangularConnectors-Headers,MalePins, Fastening Type=-, Features=-, Manufacturer URL=http://www.samtec.com/, Mounting Type=SurfaceMount, Number of Positions=10, Number of Positions Loaded=All, Number of Rows=2, Package URL=http://suddendocs.samtec.com/prints/ftsh-1xx-xx-xxx-dv-xxx-footprint.pdf, Packaging=Tube, Pitch="0.050\"(1.27mm)", Row Spacing="0.050\"(1.27mm)", Series=FTSH, Termination=Solder
T1: library part CMP-07264-000001-1, "BMS XFORMER 1-CH 1000V AECQ +125", Isolation Voltage=4300VDC, Manufacturer=Bourns, Package=0, Temperature="-40°C to +125°C", Temperature Range High=+125°C, Temperature Range Low=-40°C, Automotive=Yes, Automotive Grade="Grade 1", Category=Trans, ComponentLink2Description=Datasheet, ComponentLink2URL=https://www.bourns.com/docs/product-datasheets/SM91502AL.pdf, Device Class L1="Passive Components", Device Class L2=Transformers, Device Class L3=unset, Digikey Description="BMS XFORMER 1-CH 1000V AECQ +125", Height=5.72mm, Insertion Loss=-0.25dB, Lead Free=Yes, Manufacturer Part Number=SM91502ALE, Octopart=https://octopart.com/sm91502ale-bourns-95732123, Return Loss=-22dB, RoHS=TRUE, Standoff Height=0.13mm, Turns Ratio=1:1
TP1 TP2 TP3 TP4 TP5 TP6 TP7 TP8 TP9 TP10 TP11 TP12 TP13 TP14 TP15 TP16 TP17 TP18 TP19 TP20 TP21 TP22 TP23 TP24 TP25 TP26 TP27 TP28: library part Testpoint1
U1: "Undefined or Miscellaneous", Manufacturer_Name=RENATA, Mouser Part Number=614-SMTU2032-LF, Datasheet Link=https://componentsearchengine.com/Datasheets/1/SMTU2032-LF.pdf, Height=5mm, Manufacturer_Part_Number=SMTU2032-LF, Mouser Price/Stock=https://www.mouser.co.uk/ProductDetail/Renata/SMTU2032-LF?qs=r1PAtlylphCLeXbokB9Tog%3D%3D
U2: "1.6 V to 5.5 V, 2.5-A Low IQ Power Mux with Manual and Priority Switchover", Package=None, Availability=Unavailable, MF="{'manufacturer': u'Texas Instruments'}", MP=TPS2116DRLR, Price=None
U3: library part CMP-0062-00201-4, "1A Low Dropout Regulator for 5V to 3.3V Conversion, 3-pin TO-263", Manufacturer="Texas Instruments", PackageTopMarking="NSUZXYTTE#*LM3940IS*-3.3 P+", PowerWise=N, Code_JEDEC=MO-169-AA, ComponentLink1Description="Datasheet URL", ComponentLink1URL=http://www.ti.com/general/docs/lit/getliterature.tsp?genericPartNumber=LM3940&fileType=pdf, CompType="LDO IC", PackageDescription="TO-263, Molded, .400 x .390 x .180in, 3 Lead, .1in Pitch, Surface Mount", PackageReference=KTT0003B, PinCount=3, RoHS=N
U4: library part CMP-08107-000010-1, "IC USB TO UART BRIDGE QFN24"
U5 U6: library part CMP-0315-00093-2, "Isolated CAN Transceiver, -55 to 105 degC, 8-pin SOP (DUB), Green (RoHS & no Sb/Br)", Drivers Per Package=1, Manufacturer="Texas Instruments", Rating=Catalog, ComponentLink1Description=Datasheet, ComponentLink1URL=http://www.ti.com/general/docs/lit/getliterature.tsp?genericPartNumber=ISO1050&fileType=pdf, ComponentLink2Description="Package Specification", ComponentLink2URL=http://www.ti.com/litv/pdf/mpds247b, DatasheetVersion=SLLS983E, Eco-Plan="Green (RoHS & no Sb/Br)", Isolated=Yes, Mounting Technology="Surface Mount", PackageDescription="8-Pin Small Outline Package 2.54 mm Pitch", PackageReference=DUB0008A, PackageVersion="revC, May-2006", PartNumber=ISO1050DUBR, SubFamily=CAN
Y1: "Crystal or Oscillator", Manufacturer_Name=Fox, Mouser Part Number=559-FC3BACAGI16.0, Datasheet Link=https://www.foxonline.com/wp-content/uploads/pdfs/C3BA.pdf, Height=0.8mm, Manufacturer_Part_Number=FC3BACAGI16.0, Mouser Price/Stock=https://www.mouser.co.uk/ProductDetail/Fox/FC3BACAGI160?qs=W0yvOO0ixfHpyQil83gR7Q%3D%3D
Y2: "Crystal or Oscillator", Manufacturer_Name=Fox, Mouser Part Number=559-FX135A-327, Datasheet Link=https://componentsearchengine.com/Datasheets/2/FX135A-327.pdf, Height=0.9mm, Manufacturer_Part_Number=FX135A-327, Mouser Price/Stock=https://www.mouser.co.uk/ProductDetail/Fox-Abracon/FX135A-327?qs=n5MbhIql%252BRlKJidsig7mKQ%3D%3D
C1 C2 C3 C4 C5 C6 C7 C8 C9 C10 C11 C12 C13 C14 C15 C17 C18 C19 C20 C21 C22 C23 C24 C25 C26 C27 C28 C29 C30 C31 C32 C33 C34 C35 L1 L2 L3: SimulationGenericComponent=True
R1 R2 R3 R4 R5 R6 R7 R8 R9 R10 R11 R12 R13 R14 R15 R16 R17 R18 R19 R20 R21 R22 R23 R24 R25 R26 R27 R28 R29 R30 R31 R32 R33 R34 R35 R36 R37 R38: SimulationGenericComponent=True, TC1=0, TC2=0

## Free pads (board coordinates)
  round 200 hole 133.86: PTH1(150,5250) PTH2(3450,5250) PTH3(150,150) PTH4(3450,150)

## Via types
v1: diameter 25, hole 14, Signal 1 to Signal 2, tented both sides, 107 vias
v2: diameter 50, hole 28, Signal 1 to Signal 2, 21 vias
v3: diameter 50, hole 28, Signal 1 to Signal 2, tented both sides, 2 vias

## Nets (pads, with @x,y where several pads share a name; then routed paths per layer and width w, separated by ;. In a path a pad name is that pad's centre, name@x,y a point inside that pad or via, vN(x,y) a via of type N, cw(c..) or ccw(c..) an arc to the next point about the centre after c; other vN are vias at no path point)
CAN_EXT_1_N: D1.2 J7.4 R30.1 U5.6 | length 1018.5
  Signal 1 w15: U5.6@2252.48,2065 2252.48,2093.71 2261.27,2102.5 2306.2,2102.5 2371.2,2037.5 2401.63,2037.5 2410.41,2028.71 2410.41,2020.85 2418.66,2012.6 D1.2@2420.63,2012.6 2420.96,2012.26 2451.19,2012.26 2466.29,1997.16 2532.45,1997.16 2567.29,2032 2567.29,2033.75 2578.05,2044.52 2590.48,2044.52 2604.81,2030.18 2604.81,1997.7 2637.05,1965.47 2642.95,1965.47 2685,2007.52 2685,2090 2693.79,2098.79 2706.21,2098.79 2742.5,2062.5 2813.51,2062.5 2828.08,2047.93 2828.08,2022.98 2876.06,1975 J7.4@2948.5,1975
CAN_EXT_1_P: D1.1 J7.2 R29.2 U5.7 | length 1194.3
  Signal 1 w15: U5.7@2252.48,2165 2252.48,2136.29 2261.27,2127.5 2316.56,2127.5 2381.56,2062.5 2401.63,2062.5 2410.41,2071.29 2410.41,2079.15 2418.66,2087.4 D1.1@2420.63,2087.4 2422.6,2087.4 2430.85,2079.15 2430.85,2067.38 2456.17,2042.06 2456.17,2037.82 2475.23,2018.75 2523.51,2018.75 2545.69,2040.94 2545.69,2042.69 2569.11,2066.11 2569.27,2066.11 2586.85,2083.7 2586.85,2234.33 2637.05,2284.53 2642.95,2284.53 2685,2242.48 2685,2155.36 2703.96,2136.39 2752.86,2087.5 2819.3,2087.5 2828.08,2096.29 2828.08,2127.02 2876.06,2175 J7.2@2948.5,2175
CAN_EXT_2_N: D2.2 J8.4 R32.1 U6.6 | length 1007.3
  Signal 1 w15: U6.6@2250.21,1350 2250.21,1378.71 2259,1387.5 2310.07,1387.5 2360.07,1337.5 2396.63,1337.5 2405.41,1328.71 2405.41,1320.85 2413.66,1312.6 D2.2@2415.63,1312.6 2416.09,1313.06 2446.98,1313.06 2464.02,1296.02 2524.72,1296.02 2548.06,1319.35 2548.06,1323.6 2574.46,1350 2591.21,1350 2598.39,1342.83 2600,1341.21 2600,1307.52 2637.05,1270.47 2642.95,1270.47 2700,1327.52 2700,1385.99 2712.22,1398.21 2726.21,1398.21 2761.92,1362.5 2819.3,1362.5 2828.08,1353.71 2828.08,1322.98 2876.06,1275 J8.4@2948.5,1275
CAN_EXT_2_P: D2.1 J8.2 R31.2 U6.7 | length 1184.1
  Signal 1 w15: U6.7@2250.21,1450 2250.21,1421.29 2259,1412.5 2320.42,1412.5 2370.42,1362.5 2396.63,1362.5 2405.41,1371.29 2405.41,1379.15 2413.66,1387.4 D2.1@2415.63,1387.4 2417.6,1387.4 2425.85,1379.15 2425.85,1367.38 2433.95,1359.28 2433.95,1355.04 2472.5,1316.49 2516.24,1316.49 2527.59,1327.83 2527.59,1332.07 2585,1389.49 2585,1527.48 2637.05,1579.53 2642.95,1579.53 2700,1522.48 2700,1432 2708.79,1423.21 2736.57,1423.21 2772.28,1387.5 2819.3,1387.5 2828.08,1396.29 2828.08,1427.02 2876.06,1475 J8.2@2948.5,1475
CAN_EXT_5V0_1: C29.2 C30.2 J7.3 U5.8 | length 455
  Signal 1 w10: U5.8@2252.48,2265 2252.76,2265.28 2352.72,2265.28 C29.2@2353,2265.56 C30.2@2433,2265.56 2536.5,2265.56 2545.94,2275 v1(2550,2275) v1@2548.72,2276.28 ; J7.3@2948.5,2075 v1(3100,2075)
CAN_EXT_5V0_2: C34.2 C35.2 J8.3 U6.8 | length 463.8
  Signal 1 w10: U6.8@2250.21,1550 2250.43,1549.78 2351.78,1549.78 C34.2@2352,1549.56 C35.2@2432,1549.56 2524.56,1549.56 v1(2550,1575) v1@2548.72,1576.28 ; J8.3@2948.5,1375 v1(3100,1375)
CAN_EXT_GND_1: C26.1 C29.1 C30.1 D1.3 J7.1 U5.5 | length 545.6
  Signal 1 w10: U5.5@2252.48,1965 v1(2335,1965) ; C29.1@2353,2210.44 C30.1@2433,2210.44 2436.74,2210.44 2497.13,2150.05 2497.13,2142.87 v1(2500,2140) 2500,2050.63 D1.3@2499.37,2050 ; C26.1@2638.27,2097.44 2642.01,2097.44 2661.29,2116.72 2667.13,2116.72 v1(2670,2119.59) ; J7.1@2948.5,2275 v1(3100,2275)
CAN_EXT_GND_2: C31.1 C34.1 C35.1 D2.3 J8.1 U6.5 | length 524.3
  Signal 1 w10: U6.5@2250.21,1250 v1(2325,1250) ; C34.1@2352,1494.44 C35.1@2432,1494.44 2441.76,1484.68 2455.32,1484.68 v1(2495,1445) 2495,1350.63 D2.3@2494.37,1350 ; C31.1@2638.27,1397.44 2644.91,1404.09 2672.09,1404.09 v1(2674,1406) ; J8.1@2948.5,1575 v1(3100,1575)